# Altium PCB PCB1.PcbDoc
Units mil, origin at the board's own origin, x right, y up, seen from the top; angles counter-clockwise.
Board outline 9740.03 x 7160.02 mil, 2 copper layers (Top Layer, Bottom Layer); 63 components, 65 nets, 225 pads, 0 vias.
Unrouted connection lines stored in the file: 154.
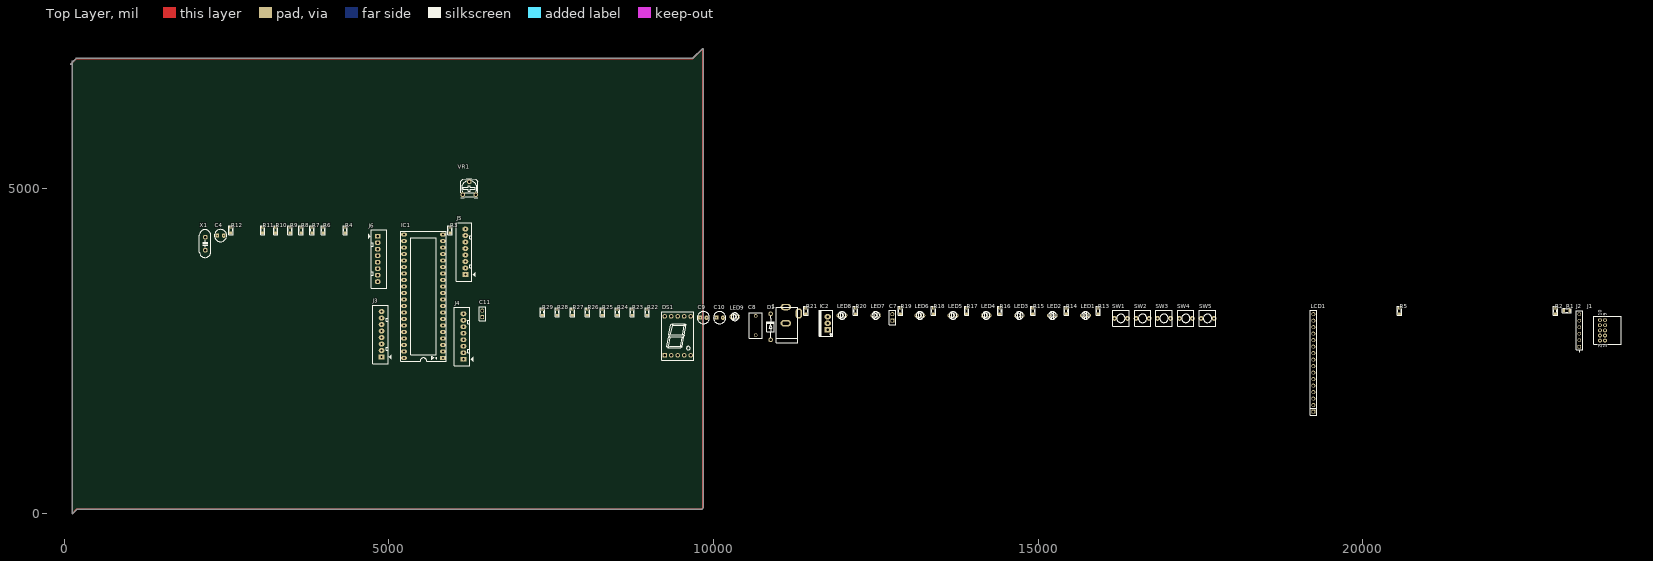
[diagram p0: Top Layer view]
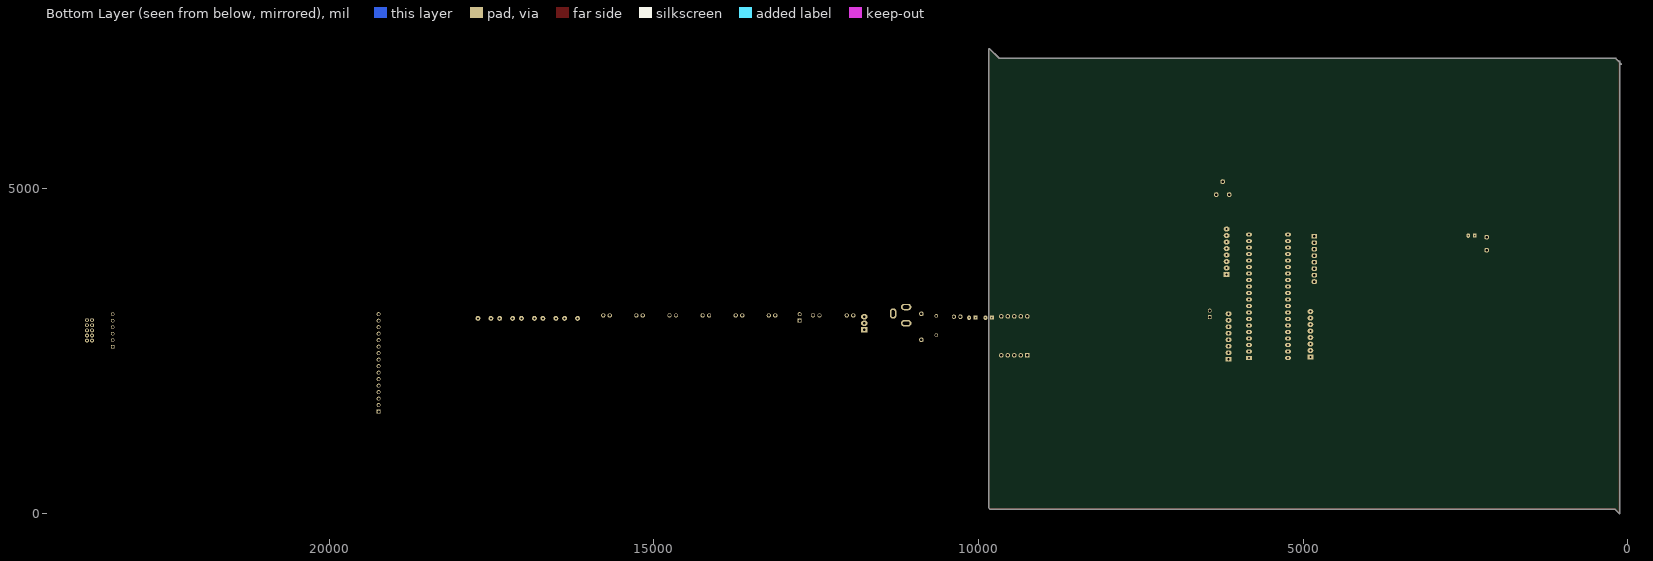
[diagram p1: Bottom Layer view, seen from below]

## Layer stack, top to bottom
Top Solder: solder mask 0.4, Solder Resist, Dk 3.5
Top Layer: signal copper 1.4
Dielectric 1: dielectric 12.6, FR-4, Dk 4.8
Bottom Layer: signal copper 1.4
Bottom Solder: solder mask 0.4, Solder Resist, Dk 3.5

## Board outline
108.55,6916.47 cw(c105,6920.02) 101.45,6923.56 124.98,6947.09 124.98,6960.02 cw(c130,6960.02) 135.01,6960.02 135.01,6957.12 186.45,7008.56 190,7010.03 9682.92,7010.03 9831.45,7158.56 9831.44,7158.54 cw(c9835,7155.02) 9840.01,7155.02 9840.01,85.02 9838.55,81.47 9823.55,66.47 9820,65 197.08,65 133.55,1.47 133.56,1.49 cw(c130,5.01) 124.98,5.01 124.98,6932.91

## Design rules (kind name [scope] priority, off if disabled: settings)
Clearance [All] p1: gap=10 ignorepadtopadclearanceinfootprint=FALSE except(0: Arc-Hole Track-Hole SMDPad-Hole THPad-Hole Via-Hole Fill-Hole Poly-Hole Region-Hole Text-Hole)
PolygonConnect [All] p1: connectstyle=Relief reliefconductorwidth=10 reliefentries=4 polygonreliefangle="90 Angle" airgapwidth=10
RoutingVias [All] p1: holewidth=28 width=50 viastyle="Through Hole" minholewidth=28 minwidth=50 maxholewidth=28 maxwidth=50
SolderMaskExpansion [All] p1: expansion=4 istentingtop=FALSE
Width [All] p1: maxlimit=10 minlimit=10 preferedwidth=10
30 further rules are at their usual default settings.

## Components (designator, comment, footprint, x,y, rotation, side; value= is the part's Value field where it differs from the comment)
1 "Jac DC" DC0 11215,3055 r90 top
C4 "CN-ALU-DIP" CA-ALU-2.54 2410,4280.02 r0 top value=104
C7 "JP2" JP2-C1T 12755,2970 r90 top
C8 "CN-SEMI-DIP" C-SE-7,5x10x9x5x4 10650,2895.01 r90 top value=104
C9 "CN-ALU-DIP" CA-ALU-2.54 9845,3015.01 r0 top value=104
C10 "CN-ALU-DIP" CA-ALU-2.54 10095,3015.01 r0 top value=104
C11 "JP2" JP2-C1T 6440,3025 r90 top
D1 "Diode" DIO-1A 10880,2675.01 r90 top value=1N5007
DS1 "7SEG" LED7SEG-1-0.56 9445,2710.01 r0 top
IC1 "ATMEL 16L" DIP40/W0.6 5835,2395.01 r90 top value="Atmega 16L"
IC2 "LM78xx" TO220-123 11760,2830 r90 top
J1 "SAMTEC-TMM-105-01-X-D-RA" SAMTEC-TMM-105-01-X-D-RA 23810,2820 r90 top
J2 "HW-06-12-T-S-570-230" SAMTEC_HW-06-12-T-S-570-230 23335,2570 r90 top
J3 "PA" Header8 4890,2410 r90 top value="Connector 8"
J4 "PB" Header8 6150,2375 r90 top value="Connector 8"
J5 "PD" Header8 6180,3680 r90 top value="Connector 8"
J6 "PC" Header8 4830,4270 r270 top value="Connector 8"
LCD1 "LCD 16x2A" JP16-C1T 19240,1570 r90 top value=LCD16x2A
LED1 "LED" LED-3MM-YELLOW 15680,3050 r0 top value="LED 3 ly Single Colour"
LED2 "LED" LED-3MM-YELLOW 15170,3050 r0 top value="LED 3 ly Single Colour"
LED3 "LED" LED-3MM-YELLOW 14660,3050 r0 top value="LED 3 ly Single Colour"
LED4 "LED" LED-3MM-YELLOW 14150,3050 r0 top value="LED 3 ly Single Colour"
LED5 "LED" LED-3MM-YELLOW 13640,3050 r0 top value="LED 3 ly Single Colour"
LED6 "LED" LED-3MM-YELLOW 13130,3050 r0 top value="LED 3 ly Single Colour"
LED7 "LED" LED-3MM-YELLOW 12450,3050 r0 top value="LED 3 ly Single Colour"
LED8 "LED" LED-3MM-YELLOW 11930,3050 r0 top value="LED 3 ly Single Colour"
LED9 "LED" LED-3MM-YELLOW 10280,3030.01 r0 top value="LED 3 ly Single Colour"
R1 "10K" RES-SMD-0805 23140,3125 r0 top
R2 "10K" RES-SMD-0805 22965,3120 r90 top
R3 "10K" RES-SMD-0805 5945,4365.02 r90 top
R4 "Res" RES-SMD-0805 4330,4365.02 r90 top
R5 "Res" RES-SMD-0805 20565,3120 r90 top
R6 "Res" RES-SMD-0805 3990,4365.02 r90 top
R7 "Res" RES-SMD-0805 3820,4365.02 r90 top
R8 "Res" RES-SMD-0805 3650,4365.02 r90 top
R9 "Res" RES-SMD-0805 3480,4365.02 r90 top
R10 "Res" RES-SMD-0805 3260,4365.02 r90 top
R11 "Res" RES-SMD-0805 3060,4365.02 r90 top
R12 "Res" RES-SMD-0805 2570,4365.02 r90 top
R13 "Res" RES-SMD-0805 15925,3120 r90 top
R14 "Res" RES-SMD-0805 15435,3120 r90 top
R15 "Res" RES-SMD-0805 14920,3120 r90 top
R16 "Res" RES-SMD-0805 14410,3120 r90 top
R17 "Res" RES-SMD-0805 13900,3120 r90 top
R18 "Res" RES-SMD-0805 13390,3120 r90 top
R19 "Res" RES-SMD-0805 12880,3120 r90 top
R20 "Res" RES-SMD-0805 12190,3120 r90 top
R21 "Res" RES-SMD-0805 11425,3120 r90 top
R22 "Res" RES-SMD-0805 8980,3100.01 r90 top
R23 "Res" RES-SMD-0805 8750,3100.01 r90 top
R24 "Res" RES-SMD-0805 8520,3100.01 r90 top
R25 "Res" RES-SMD-0805 8290,3100.01 r90 top
R26 "Res" RES-SMD-0805 8060,3100.01 r90 top
R27 "Res" RES-SMD-0805 7830,3100.01 r90 top
R28 "Res" RES-SMD-0805 7595,3100.01 r90 top
R29 "Res" RES-SMD-0805 7365,3100.01 r90 top
SW1 "SW" SW2 16175,3005 r0 top value="SW chip 2 pin"
SW2 "SW" SW2 16510,3005 r0 top value="SW chip 2 pin"
SW3 "SW" SW2 16840,3005 r0 top value="SW chip 2 pin"
SW4 "SW" SW2 17175,3005 r0 top value="SW chip 2 pin"
SW5 "SW" SW2 17510,3005 r0 top value="SW chip 2 pin"
VR1 "10K" VR 6140,4910 r0 top value="VR 10K"
X1 "12Mhz" XT2 2175,4155.02 r90 top value=4Mhz

## Footprints (in the part's own frame and the unit in brackets; to place one, negate y for a bottom-side part, rotate by r counter-clockwise, add the part's x,y. Pads: shape width x height; smd on the part's side, far side on the other; paste and mask are expansions set on the pad)
C-SE-7,5x10x9x5x4 [mm] "Film Capacitors, 2-Leads, Body 7,5x10x9x5"
  round 1.4 hole 0.9: 1(-3.75,0) 2(3.75,0)
  silkscreen extent -5,-2.5 5,2.5, body extent -5,-2.5 5,2.5, height 9.01
CA-ALU-2.54 [mm]
  rect 1.5x1.58 hole 0.6: 1(-1.27,0)
  oval 1.5x1.8 hole 0.6: 2(1.27,0)
  silkscreen extent -2.39,-2.39 2.39,2.39, body extent -2,-2.03 1.99,1.97, height 7.01
DC0 [mil] "Jac DC input"
  oval 100x160 hole 50 slot 100 at 90 deg: 1(125,100) 2(-125,100)
  oval 160x100 hole 50 slot 100 at 0 deg: 3(25,-100)
  silkscreen extent -425,-80 120,250, body extent -410,-105 134,269, height 434
DIO-1A [mil]
  round 70 hole 40: 1(0,0) 2(400,0)
  silkscreen extent 35,-55 365,55, body extent -11,-50 411,54, height 102
DIP40/W0.6 [mil] "40 PIN, W 600mil, Pin to pin 100mil"
  rect 60x90 hole 31: 1(0,0)
  oval 60x90 hole 31: 2(100,0) 3(200,0) 4(300,0) 5(400,0) 6(500,0) 7(600,0) 8(700,0) 9(800,0) 10(900,0) 11(1000,0) 12(1100,0) 13(1200,0) 14(1300,0) 15(1400,0) 16(1500,0) 17(1600,0) 18(1700,0) 19(1800,0) 20(1900,0) 21(1900,600) 22(1800,600) 23(1700,600) 24(1600,600) 25(1500,600) 26(1400,600) 27(1300,600) 28(1200,600) 29(1100,600) 30(1000,600) 31(900,600) 32(800,600) 33(700,600) 34(600,600) 35(500,600) 36(400,600) 37(300,600) 38(200,600) 39(100,600) 40(0,600)
  silkscreen extent -50,-50 1950,650, body extent -82,-10 1982,600, height 224
Header8 [mil] "CON8"
  rect 75x90 hole 34: 1(0,0)
  oval 75x90 hole 34: 2(100,0) 3(200,0) 4(300,0) 5(400,0) 6(500,0) 7(600,0) 8(700,0)
  silkscreen extent -100,-150 800,140
JP2-C1T [mm] "2 row, straight, gold plating"
  rect 1.52x1.52 hole 1.02: 1(0,0)
  round 1.52 hole 1.02: 2(2.54,0)
  silkscreen extent -1.52,-1.27 4.06,1.27, body extent -1.52,-1.25 4.06,1.25, height 8.51
JP16-C1T [mm] "16 row, straight, gold plating"
  rect 1.52x1.52 hole 1.02: 1(0,0)
  round 1.52 hole 1.02: 2(2.54,0) 3(5.08,0) 4(7.62,0) 5(10.16,0) 6(12.7,0) 7(15.24,0) 8(17.78,0) 9(20.32,0) 10(22.86,0) 11(25.4,0) 12(27.94,0) 13(30.48,0) 14(33.02,0) 15(35.56,0) 16(38.1,0)
  silkscreen extent -1.52,-1.27 39.62,1.27, body extent -1.52,-1.25 39.62,1.25, height 8.51
LED7SEG-1-0.56 [mil]
  rect 70x70 hole 40: 1(-195,-275)
  round 70 hole 40: 2(-95,-275) 3(5,-275) 4(105,-275) 5(205,-275) 6(205,325) 7(105,325) 8(5,325) 9(-95,325) 10(-195,325)
  silkscreen extent -239,-350 249,400, body extent -241,-349 251,399, height 315
LED-3MM-YELLOW [mil]
  oct 65x65 hole 40: 1(0,0)
  round 65 hole 40: 2(100,0)
  silkscreen extent -9,-59 109,59, body extent -27,-77 117,80, height 181
RES-SMD-0805 [mil]
  rect 39.37x55 smd: 1(-45,0) 2(45,0)
  silkscreen extent -70,-34 70,33, body extent -39,-25 39,25, height 31
SAMTEC-TMM-105-01-X-D-RA [mm]
  round 1.49 hole 0.89 mask+0: 1(-4,2.019) 2(-4,4.019) 3(-2,2.019) 4(-2,4.019) 5(0,2.019) 6(0,4.019) 7(2,2.019) 8(2,4.019) 9(4,2.019) 10(4,4.019)
  silkscreen extent -5.45,-4.4 5.45,6.39
SAMTEC_HW-06-12-T-S-570-230 [mm]
  rect 1.37x1.37 hole 1.02: 01(0,0)
  round 1.37 hole 1.02: 02(2.54,0) 03(5.08,0) 04(7.62,0) 05(10.16,0) 06(12.7,0)
  silkscreen extent -2.02,-1.27 13.97,1.27
SW2 [mil] "SW button 2pin, 250x 250 mil"
  round 75 hole 31: 1(0,0) 2(200,0)
  silkscreen extent -25,-125 225,125
TO220-123 [mil] "TO-220 - 1-2-3"
  rect 80x100 hole 39: 1(0,0)
  oval 80x100 hole 39: 2(100,0) 3(200,0)
  silkscreen extent -100,-76 300,130, body extent -95,-80 295,97, height 323
VR [mil] "Resistor Variable"
  round 75 hole 35: 1(0,0) 2(100,200) 3(200,0)
  silkscreen extent -31,-44 231,246, body extent -87,-30 307,372, height 165
XT2 [mil] "Footpin for Crystal 2 pin"
  round 75 hole 34: 1(-100,0) 2(100,0)
  silkscreen extent -213,-83 217,90, body extent -216,-87 216,90, height 144

## Part data
1: library part DCIN, "Jac DC input"
C4 C8 C9 C10: "Capacitor (Semiconductor SIM Model)", LatestRevisionDate=17-Jul-2002, LatestRevisionNote="Re-released for DXP Platform.", PackageReference=C1206, Publisher="Altium Limited"
C7 C11: "WR-PHD 2.54 mm Angled Socket Header", Manufacturer="W¨¹rth Elektronik eiSos GmbH", partNo=613002143121, ComponentLink1 Description=Manufacturer, ComponentLink1URL=http://www.we-online.com, ComponentLink2 Description=Datasheet, ComponentLink2URL=http://katalog.we-online.de/em/datasheet/6130xx143121.pdf, Created by="Karrer Zheng", Created Date="29 March 2013", NoPins=02
D1: "Default Diode", Code - JEDEC=DO-214-AB, Published=8-Jun-2000, Publisher="Altium Limited", Revision="July-2002: Re-released for DXP Platform."
DS1: library part LED7SEG-1, "14.2 mm General Purpose Blue 7-Segment Display: CC, RH DP, Gray Surface", Colour=Blue, PackageDocument=24-Sep-2002, ComponentLink1Description="Manufacturer Link", ComponentLink1URL=http://www.agilent.com/, DatasheetDocument=24-Sep-2002, LatestRevisionDate=17-Dec-2003, LatestRevisionNote="Schematic revised, PCB Footprint replaced.", MinimumIntensity="2020 ucd", Note="IF = 10 mA", PackageReference=H, Published=8-Jun-2000, Publisher="Altium Limited"
IC1: library part Atmega16L, "8-Bit AVR Microcontroller with 16K Bytes of In-System Programmable Flash Memory"
IC2: "Positive Voltage Regulator", ComponentLink1Description="Manufacturer Link", ComponentLink1URL=http://www.st.com/, ComponentLink2Description=Datasheet, ComponentLink2URL=http://www.st.com/stonline/products/literature/ds/2146/l78m05c.pdf, DatasheetVersion=Apr-1994, LatestRevisionDate=17-Jul-2002, LatestRevisionNote="Re-released for DXP Platform.", Note="Tab is connected to pin 3 (GND).", PackageDescription="TO, Thru-Hole, Vertical, Heatsink Mounted; 3 In-Line Leads; Pitch 2.54 mm; Pin sequence 1, 3, 2", PackageReference=ISOWATT220AB, PackageVersion=Jul-1998, Published=24-Aug-2001, Publisher="Altium Limited"
J1 J2: Package=None, Availability=Unavailable, Price=None
  J1: MF=Samtec, MP=SAMTEC-TMM-105-01-X-D-RA
  J2: MP=HW-06-12-T-S-570-230
J3 J4 J5 J6: library part Header8, "Connector 8"
LCD1: library part LCD16x2A, "LCD dipslay 16 char, 2 line"
LED1 LED2 LED3 LED4 LED5 LED6 LED7 LED8 LED9: "LED Single colour Green and Red"
R1 R2 R3: library part Res-SMD, "R3", Manufacturer="Generic Components", Class=Passive, Published=08/06/2000, Publisher="Altium Hobart Technology Centre"
R4 R5 R6 R7 R8 R9 R10 R11 R12 R13 R14 R15 R16 R17 R18 R19 R20 R21 R22 R23 R24 R25 R26 R27 R28 R29: library part Res-SMD, "Resistor", Manufacturer="Generic Components", Class=Passive, Published=08/06/2000, Publisher="Altium Hobart Technology Centre"
SW1 SW2 SW3 SW4 SW5: library part SW2, "Switch button 2 pin"
VR1: library part VR1, "Var Resistor"
X1: library part XT2, "Crystal, 32.768 KHz, -40 to 85 degC, 3.2 x 1.5 x 0.9 mm SMD"

## Nets (pads, with @x,y where several pads share a name; then routed paths per layer and width w, separated by ;. In a path a pad name is that pad's centre, name@x,y a point inside that pad or via, vN(x,y) a via of type N, cw(c..) or ccw(c..) an arc to the next point about the centre after c; other vN are vias at no path point)
"AVR RX": IC1.14 J5.1 LED1.2 R2.2
"AVR TX": IC1.15 J5.2 LED2.2 R1.2
"FT RX": J2.02 R1.1
"FT TX": J2.03 R2.1
GND: 1.2 1.3 C4.2 C8.1 C9.2 C10.2 IC1.11 IC1.31 IC2.2 J1.4 J1.6 J1.8 J1.10 J2.06 LCD1.1 LED9.2 R5.1 SW1.1 SW2.1 SW3.1 SW4.1 SW5.1 VR1.3
MISO: IC1.7 J1.9 J4.7 R11.1
MOSI: IC1.6 J1.1 J4.6 R9.1
Net1_1: 1.1 D1.1
NetC3_2: IC1.32
NetC4_1: C4.1 IC1.9 R10.2
NetC5_2: IC1.12 X1.1
NetC6_2: IC1.13 X1.2
NetC7_2: C7.2 R13.2 R14.2 R15.2 R16.2 R17.2 R18.2 R19.2 R20.2
NetC9_1: C9.1 D1.2 IC2.1
NetC11_2: C11.2 DS1.3 DS1.8
NetDS1_1: DS1.1 R26.1
NetDS1_2: DS1.2 R25.1
NetDS1_4: DS1.4 R24.1
NetDS1_5: DS1.5 R29.1
NetDS1_6: DS1.6 R23.1
NetDS1_7: DS1.7 R22.1
NetDS1_9: DS1.9 R27.1
NetDS1_10: DS1.10 R28.1
NetLCD1_3: LCD1.3 R5.2
NetLED1_1: LED1.1 R13.1
NetLED2_1: LED2.1 R14.1
NetLED3_1: LED3.1 R15.1
NetLED4_1: LED4.1 R16.1
NetLED5_1: LED5.1 R17.1
NetLED6_1: LED6.1 R18.1
NetLED7_1: LED7.1 R19.1
NetLED8_1: LED8.1 R20.1
NetLED9_1: LED9.1 R21.1
PA0: IC1.40 J3.1 VR1.2
PA1: IC1.39 J3.2
PA2: IC1.38 J3.3
PA3: IC1.37 J3.4
PA4: IC1.36 J3.5
PA5: IC1.35 J3.6
PA6: IC1.34 J3.7
PA7: IC1.33 J3.8
PB0: IC1.1 J4.1 R3.1 SW1.2
PB1: IC1.2 J4.2 R4.1 SW2.2
PB2: IC1.3 J4.3 R6.1 SW3.2
PB3: IC1.4 J4.4 R7.1 SW4.2
PB4: IC1.5 J4.5 R8.1
PB6: IC1.20
PB7: IC1.21
PC0: IC1.22 J6.1 LCD1.7 R26.2
PC1: IC1.23 J6.2 LCD1.8 R25.2
PC2: IC1.24 J6.3 LCD1.9 R24.2
PC3: IC1.25 J6.4 LCD1.10 R29.2
PC4: IC1.26 J6.5 LCD1.11 R23.2
PC5: IC1.27 J6.6 LCD1.12 R22.2
PC6: IC1.28 J6.7 LCD1.13 R27.2
PC7: IC1.29 J6.8 LCD1.14 R28.2
PD2: IC1.16 J5.3 LED3.2
PD3: IC1.17 J5.4 LED4.2
PD4: IC1.18 J5.5 LED5.2
PD5: IC1.19 J5.6 LCD1.5 LED6.2
PD6: J5.7 LCD1.4 LED7.2
PD7: J5.8 LCD1.6 LED8.2
RESET: J1.5 SW5.2
SCK: IC1.8 J1.7 J4.8 R12.1
VCC: C7.1 C8.2 C10.1 C11.1 IC1.10 IC1.30 IC2.3 J1.2 LCD1.2 R3.2 R4.2 R6.2 R7.2 R8.2 R9.2 R10.1 R11.2 R12.2 R21.2 VR1.1
pads on no net: J1.3 J2.01 J2.04 J2.05 LCD1.15 LCD1.16
copper on no net: | length 33590.5
  Top Layer w10: 105,6920.02 190,7005.02 9685,7005.02 9835,7155.02 9835,85.02 9820,70.02 195,70.02 130,5.01 130,6960.02

## Text inside footprints (layer, text, board x,y; h text height)
J1: Top Overlay "1" at 23755.51,2551.5 h50 r90; Top Overlay "2" at 23676.77,2551.5 h50 r90; Top Overlay "9" at 23755.51,3047.99 h50 r90; Top Overlay "10" at 23676.77,3047.99 h50 r90; Mechanical 13 "1.524" at 23815,2351.5 h10 r90; Mechanical 13 "2.000" at 23695,2426.5 h10 r90; Mechanical 13 "1" at 23755.51,2551.5 h50 r90; Mechanical 13 "2" at 23676.77,2551.5 h50 r90; Mechanical 13 "2.000" at 23520,2559.02 h10 r90; Mechanical 13 "10.033" at 24005,2788.5 h10 r90; Mechanical 13 "8.000" at 23480,2794.02 h10 r90; Mechanical 13 "9" at 23755.51,3047.99 h50 r90; Mechanical 13 "10" at 23676.77,3047.99 h50 r90